# EAGLE board C10 (EAGLE 7.5.0)
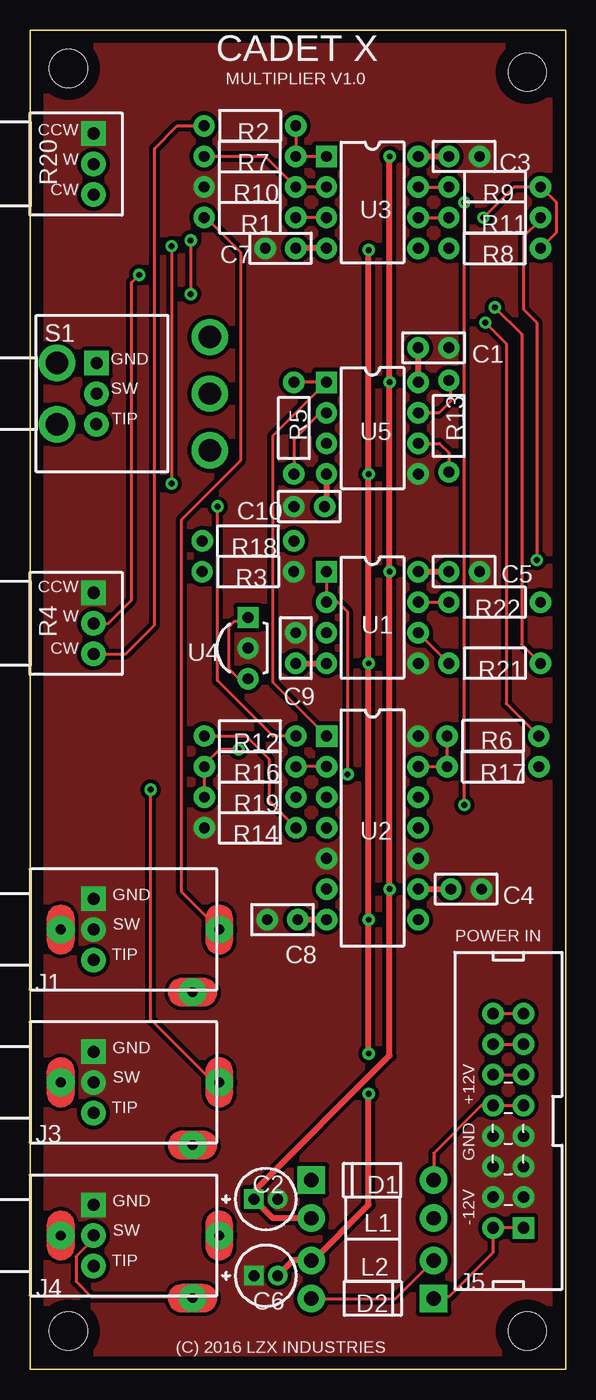
[diagram p0: board, top side]
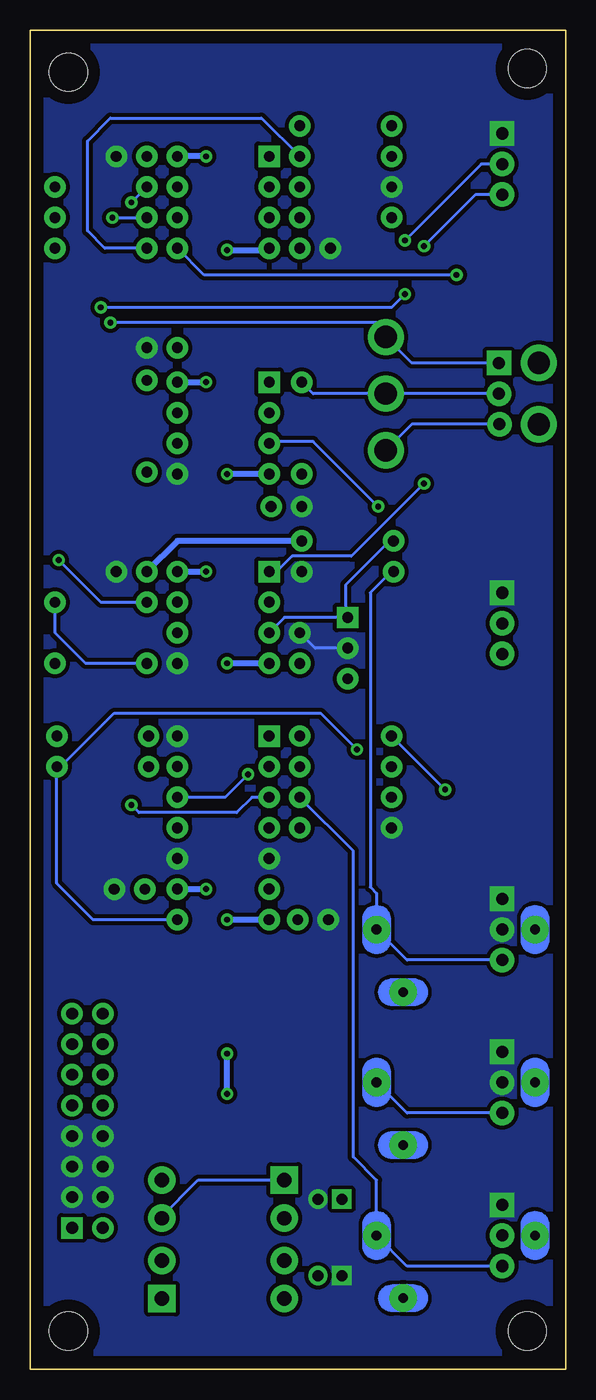
[diagram p1: board, bottom side, seen from below]

Size 44.45 x 111.12 mm. Coordinates in mm from the lower left corner, seen from the top.
Outline: 0,0 44.45,0 44.45,111.12 0,111.12 0,0
Copper layers (1*16): Top 0.035mm / dielectric 1.5mm / Bottom 0.035mm
Design rules "default *": minimum track width 10mil, minimum drill 0.61mm, track to track 8mil, track to pad 8mil, pad to pad 8mil, via to via 8mil, smd to smd 8mil, copper to edge 40mil, drill to drill 8mil, minimum pad ring 0mil, minimum via ring 8mil, stop-mask expansion 2mil, vias tented up to drill 19mil, thermal gap 10mil
Net classes: 0 Default: width 0.254 mm, clearance 0.203 mm, clearance 0.203 mm to class 1; 1 Power Rails: width 0.508 mm, clearance 0.203 mm, clearance 0.203 mm to class 0
Holes 3.17 mm at 3.17,3.17 3.17,107.95 41.27,3.17 41.27,107.63

## Footprints (pad centres in the part's own frame; a part is rotated, then mirrored left to right if it is on the bottom)
CAP-2.54/6.6x3 = drill 0.889 pad 1.778: 1 -1.27,0; 2 1.27,0
CAPPR-2/5.08 = drill 0.9 pad 1.6 square: 1 -0.991,0 | drill 0.9 pad 1.6: 2 0.991,0
CAPPR-2/5.08_C6 = drill 0.9 pad 1.6 square: 1 -0.991,0 | drill 0.9 pad 1.6: 2 0.991,0
CAP-2.54/6.6x3_C7 = drill 0.889 pad 1.778: 1 -1.27,0; 2 1.27,0
CAP-2.54/6.6x3_C8 = drill 0.889 pad 1.778: 1 -1.27,0; 2 1.27,0
CAP-2.54/6.6x3_C9 = drill 0.889 pad 1.778: 1 -1.27,0; 2 1.27,0
CAP-2.54/6.6x3_C10 = drill 0.889 pad 1.778: 1 -1.27,0; 2 1.27,0
DO-41 = drill 1.2 pad 2.286 square: 1 -5.08,0 | drill 1.2 pad 2.286: 2 5.08,0
DO-41_D2 = drill 1.2 pad 2.286 square: 1 -5.08,0 | drill 1.2 pad 2.286: 2 5.08,0
PJ302M = drill 0.8 pad 2.286: 1A 2.54,0; 2A 13.487,-5.207; 3A 15.697,0 | drill 1 pad 2.032 square: 1B 5.258,2.54 | drill 1 pad 2.032: 2B 5.258,0; 3B 5.258,-2.54
PJ302M_J4 = drill 0.8 pad 2.286: 1A 2.54,0; 2A 13.487,-5.207; 3A 15.697,0 | drill 1 pad 2.032 square: 1B 5.258,2.54 | drill 1 pad 2.032: 2B 5.258,0; 3B 5.258,-2.54
IDC16M = drill 0.965 pad 1.778 square: 1 8.89,1.27 | drill 0.965 pad 1.778: 2 8.89,-1.27; 3 6.35,1.27; 4 6.35,-1.27; 5 3.81,1.27; 6 3.81,-1.27; 7 1.27,1.27; 8 1.27,-1.27; 9 -1.27,1.27; 10 -1.27,-1.27; 11 -3.81,1.27; 12 -3.81,-1.27; 13 -6.35,1.27; 14 -6.35,-1.27; 15 -8.89,1.27; 16 -8.89,-1.27
FB-10.16/4.45x3.5 = drill 1.194 pad 2.286: 1 -5.08,0; 2 5.08,0
RES-7.62/5.1x2.5 = drill 0.889 pad 1.778: 1 -3.81,0; 2 3.81,0
RES-7.62/5.1x2.5_R2 = drill 0.889 pad 1.778: 1 -3.81,0; 2 3.81,0
ALPHA9H = drill 1 pad 2.032 square: 1 5.258,2.54 | drill 1 pad 2.032: 2 5.258,0; 3 5.258,-2.54
10TF230-DIY = drill 1.85 pad 3: 1 -4.7,14.4; 2 0,14.4; 3 4.7,14.4; A -2.55,1.7; B 2.55,1.7 | drill 1 pad 2.032 square: 1B -2.54,5 | drill 1 pad 2.032: 2B 0,5; 3B 2.54,4.964
DIP-8 = drill 0.9 pad 1.778 square: 1 -3.81,3.81 | drill 0.9 pad 1.778: 2 -3.81,1.27; 3 -3.81,-1.27; 4 -3.81,-3.81; 5 3.81,-3.81; 6 3.81,-1.27; 7 3.81,1.27; 8 3.81,3.81
DIP-14 = drill 0.9 pad 1.778 square: 1 -3.81,7.62 | drill 0.9 pad 1.778: 2 -3.81,5.08; 3 -3.81,2.54; 4 -3.81,0; 5 -3.81,-2.54; 6 -3.81,-5.08; 7 -3.81,-7.62; 8 3.81,-7.62; 9 3.81,-5.08; 10 3.81,-2.54; 11 3.81,0; 12 3.81,2.54; 13 3.81,5.08; 14 3.81,7.62
TO-92-100R = drill 0.889 pad 1.778 square: 1 2.54,0 | drill 0.889 pad 1.778: 2 0,0; 3 -2.54,0

## Placement (x,y rotation side)
C1  100n  [CAP-2.54/6.6x3]  33.49,84.77 0 top
C2  10u 25V  [CAPPR-2/5.08]  19.57,14.12 0 top
C3  100n  [CAP-2.54/6.6x3]  36.03,100.65 0 top
C4  100n  [CAP-2.54/6.6x3]  36.2,39.85 0 top
C5  100n  [CAP-2.54/6.6x3]  36.03,66.2 0 top
C6  10u 25V  [CAPPR-2/5.08_C6]  19.57,7.77 0 top
C7  100n  [CAP-2.54/6.6x3_C7]  20.79,93.03 0 top
C8  100n  [CAP-2.54/6.6x3_C8]  20.96,37.31 0 top
C9  100n  [CAP-2.54/6.6x3_C9]  22.06,59.85 270 top
C10  100n  [CAP-2.54/6.6x3_C10]  23.17,71.59 0 top
D1  1N4001  [DO-41]  28.42,15.71 0 top
D2  1N4001  [DO-41_D2]  28.42,5.87 180 top
J1  PJ302M  [PJ302M]  0,36.5 0 top
J3  PJ302M  [PJ302M]  0,23.81 0 top
J4  PJ302M  [PJ302M_J4]  0,11.11 0 top
J5  EUROPWR16  [IDC16M]  39.69,20.63 270 top
L1  68R  [FB-10.16/4.45x3.5]  28.42,12.54 180 top
L2  68R  [FB-10.16/4.45x3.5]  28.42,9.05 180 top
R1  499R  [RES-7.62/5.1x2.5]  18.25,95.57 0 top
R2  4.99K  [RES-7.62/5.1x2.5_R2]  18.25,103.19 180 top
R3  100K  [RES-7.62/5.1x2.5_R2]  18.08,66.19 180 top
R4  B10K  [ALPHA9H]  0,61.9 0 top
R5  1K  [RES-7.62/5.1x2.5]  21.9,78.1 90 top
R6  1.5K  [RES-7.62/5.1x2.5_R2]  38.42,52.55 180 top
R7  1K  [RES-7.62/5.1x2.5]  18.25,100.65 0 top
R8  10K  [RES-7.62/5.1x2.5]  38.57,93.03 0 top
R9  10K  [RES-7.62/5.1x2.5_R2]  38.57,98.11 180 top
R10  665R  [RES-7.62/5.1x2.5]  18.25,98.11 0 top
R11  10K  [RES-7.62/5.1x2.5_R2]  38.57,95.57 180 top
R12  499R  [RES-7.62/5.1x2.5]  18.26,52.55 0 top
R13  1K  [RES-7.62/5.1x2.5]  34.76,78.26 90 top
R14  100K  [RES-7.62/5.1x2.5]  18.26,44.93 0 top
R16  1.5K  [RES-7.62/5.1x2.5]  18.26,50.01 0 top
R17  1.5K  [RES-7.62/5.1x2.5]  38.42,50.01 0 top
R18  4.99K  [RES-7.62/5.1x2.5]  18.09,68.74 0 top
R19  499R  [RES-7.62/5.1x2.5]  18.26,47.47 0 top
R20  B10K  [ALPHA9H]  0,100.01 0 top
R21  10K  [RES-7.62/5.1x2.5_R2]  38.57,58.58 180 top
R22  10K  [RES-7.62/5.1x2.5_R2]  38.57,63.66 180 top
S1  10TF230-DIY  [10TF230-DIY]  0.52,80.96 270 top
U1  TL072  [DIP-8]  28.41,62.39 0 top
U2  LT1251  [DIP-14]  28.42,44.93 0 top
U3  LM6172  [DIP-8]  28.41,96.84 0 top
U4  TL431  [TO-92-100R]  18.09,59.85 90 top
U5  LM6172  [DIP-8]  28.41,78.1 0 top

## Library data of the parts
C1-C10 D1 D2 J5 R1-R3 R5-R14 R16-R19 R21 R22 S1 = common
J1 J3 J4 = common; DATASHEET: http://www.thonk.co.uk/shop/pj302m/
L1 L2 = common; MANUFACTURER: Fair-Rite
R4 R20 = common; DATASHEET: http://www.thonk.co.uk/shop/alpha-9mm-pots/; MANUFACTURER: Alpha
U1 = common; DATASHEET: http://datasheets.diptrace.com\ti\TL07x.pdf; MANUFACTURER: Texas Instruments
U2 = common; DATASHEET: http://datasheets.diptrace.com\linear\LT1251_1256.pdf; MANUFACTURER: Linear
U3 U5 = common; DATASHEET: http://www.ti.com/lit/gpn/lm6172; MANUFACTURER: Texas Instruments
U4 = common; DATASHEET: http://datasheets.diptrace.com\st_micro\CD00000986.pdf; MANUFACTURER: ST Microelectronics

## Nets
0V: C1.2 C2.2 C3.2 C4.2 C5.2 C6.1 C7.1 C8.1 C9.1 C10.1 J1.1A J1.1B J1.2A J1.2B J3.1A J3.1B J3.2A J3.2B J4.1A J4.1B J5.3 J5.4 J5.5 J5.6 J5.7 J5.8 R3.1 R4.1 R10.1 R14.1 R20.1 U1.5 U2.5 U2.10 U2.14 U4.2 U5.5
+2.5V_Reference: R20.3 U1.1 U1.2 U2.12
+12V [Power Rails]: C1.1 C2.1 C3.1 C4.1 C5.1 L1.2 R18.2 U1.8 U2.9 U3.8 U5.8
-12V [Power Rails]: C6.2 C7.2 C8.2 C9.2 C10.2 L2.2 U1.4 U2.7 U3.4 U5.4
BIAS_CTRL_BUFFERED: R11.1 R22.2 U1.7
BUFFERED_VC_TO_FADER: R9.2 U2.3 U3.7
Net_0: R6.1 S1.1 S1.1B
Net_1: D2.2 L2.1
Net_2: D1.1 L1.1
Net_3: J5.13 J5.14
Net_4: J5.15 J5.16
Net_5: D2.1 J5.1 J5.2
Net_10: R1.2 U3.3
Net_13: R12.2 U5.3
Net_17: R2.2 R4.3
Net_23: R4.2 U3.5
Net_26: R5.1 U5.2
Net_27: R5.2 S1.2 S1.2B U2.1 U5.1
Net_28: R20.2 R21.1
Net_29: R13.1 U5.6
Net_30: R13.2 U5.7
Net_31: J4.2A J4.2B
Net_32: J5.11 J5.12
Net_33: D1.2 J5.9 J5.10
Net_34: J4.3A J4.3B R19.2
Net_35: S1.3 S1.3B
Net_45: R16.1 R17.2 R19.1 U2.8
Net_46: R6.2 R17.1 U2.13
Net_49: R16.2 U2.2
Net_50: R18.1 U1.3 U4.1 U4.3
Net_52: R7.1 R10.2 U3.2
Net_53: R2.1 R7.2 R8.1 U3.1
Net_54: R8.2 R9.1 R11.2 U3.6
Net_58: J1.3A J1.3B R1.1 R3.2
Net_60: R21.2 R22.1 U1.6
Net_64: J3.3A J3.3B R12.1 R14.2

## Tracks (layer width: path | path; a pad name or v marks a point on that pad's centre or on a via)
0V
  Bottom 0.254: U4.2 20.79,59.85 C9.1
  pour Top (isolate 0.33, no thermals): 0.95,110.17 43.34,110.18 43.34,0.95 0.95,0.95 0.95,9.21
  pour Bottom (isolate 0.33, no thermals): 0.95,110.17 43.34,110.18 43.34,0.95 0.95,0.95 0.95,9.21
+2.5V_Reference  (via drill 0.49 pad 1.02)
  Top 0.254: U1.1 U1.2 25.57,63.66 26.36,62.87 v26.36,49.38 | v11.75,93.2 v11.75,73.51
  Bottom 0.254: R20.3 7.47,97.47 v11.75,93.2 | v11.75,73.51 17.78,67.48 22.7,67.48 23.98,66.2 U1.1 | v26.36,49.38 28.26,47.47 U2.12
+12V  (via drill 0.49 pad 1.02)
  Top 0.508: L1.2 20.16,12.54 C2.1 18.58,14.77 29.85,26.04 v29.85,39.85 v29.85,66.2 v29.85,81.91 v29.85,100.65 | U1.8 C5.1 | U3.8 C3.1 | U5.8 C1.1 | U2.9 C4.1
  Bottom 0.508: v29.85,100.65 U3.8 | U5.8 v29.85,81.91 | U1.8 v29.85,66.2 | U2.9 v29.85,39.85 | R18.2 32.22,68.74 C5.1
-12V  (via drill 0.49 pad 1.02)
  Top 0.508: C6.2 21.83,9.04 L2.2 23.34,8.89 28.1,13.65 v28.1,22.86 | v28.1,26.2 v28.1,37.31 v28.1,58.59 v28.1,74.29 v28.1,92.88 | v28.1,22.86 | v28.1,26.2 | C9.2 U1.4 | U2.7 C8.2 | U3.4 C7.2 | U5.4 24.6,71.75 C10.2 | v28.1,22.86
  Bottom 0.508: v28.1,22.86 v28.1,26.2 | v28.1,92.88 24.75,92.88 U3.4 | U5.4 v28.1,74.29 | U2.7 v28.1,37.31 | U1.4 v28.1,58.59
BIAS_CTRL_BUFFERED  (via drill 0.49 pad 1.02)
  Top 0.254: U1.7 R22.2 | R22.2 | R11.1 42.38,95.41 40.96,93.99 40.96,87.96 42.07,86.84 v42.07,67.16
  Bottom 0.254: v42.07,67.16 38.58,63.66 34.77,63.66 R22.2
BUFFERED_VC_TO_FADER  (via drill 0.49 pad 1.02)
  Top 0.254: U3.7 R9.2 | R9.2 | v36.04,46.84 v36.04,96.83
  Bottom 0.254: U2.3 26.04,47.47 27.31,46.2 35.41,46.2 v36.04,46.84 | v36.04,96.83 R9.2
Net_0  (via drill 0.49 pad 1.02)
  Top 0.254: v37.79,86.84 39.53,85.1 39.53,55.25 R6.1
  Bottom 0.254: S1.1B 12.76,83.5 S1.1 14.92,86.84 v37.79,86.84
Net_1
  Top 0.254: D2.2 30.32,5.87 L2.1
Net_2
  Bottom 0.254: L1.1 33.66,12.54 30.49,15.71 D1.1
Net_3
  Top 0.254: J5.14 J5.13
Net_4
  Top 0.254: J5.16 J5.15
Net_5
  Top 0.254: J5.1 J5.2 38.42,9.69 34.77,6.03 33.66,6.03 D2.1
Net_10
  Top 0.254: U3.3 R1.2
Net_13  (via drill 0.49 pad 1.02)
  Top 0.254: R12.2 20.16,52.55 15.56,57.16 v15.56,71.6
  Bottom 0.254: v15.56,71.6 20.96,77 24.43,77 U5.3
Net_17
  Top 0.254: R4.3 7.92,59.36 10.32,61.76 10.32,101.29 12.22,103.19 R2.2
Net_23  (via drill 0.49 pad 1.02)
  Top 0.254: R4.2 6.49,61.9 8.41,63.82 8.41,90.18 v9.05,90.81
  Bottom 0.254: v9.05,90.81 30.01,90.81 U3.5
Net_26
  Top 0.254: U5.2 24.12,79.37 21.9,77.15 R5.1
Net_27
  Top 0.254: R5.2 U5.1 20.16,77.48 20.16,57 U2.1
  Bottom 0.254: S1.2B S1.2 | S1.2 | S1.2 20.95,80.96 R5.2
Net_28  (via drill 0.49 pad 1.02)
  Top 0.254: v13.34,93.67 v13.34,89.23 | v38.58,88.11 40.8,85.89 40.8,60.16 R21.1
  Bottom 0.254: R20.2 7,100.01 v13.34,93.67 | v13.34,89.23 14.45,88.11 v38.58,88.11
Net_29
  Top 0.254: U5.6 33.98,76.83 34.76,76.06 R13.1
Net_30
  Top 0.254: U5.7 33.97,79.37 34.93,80.34 34.93,81.91 R13.2
Net_31
  Top 0.254: J4.2B 5.26,10.81 3.81,9.37 3.81,7.3 5.08,6.03 13.36,6.03 J4.2A
Net_32
  Top 0.254: J5.12 J5.11
Net_33
  Top 0.254: J5.9 J5.10 37.46,21.9 33.5,17.94 D1.2
Net_34
  Bottom 0.254: J4.3B 13.16,8.57 J4.3A 15.7,15.7 17.62,17.62 17.62,43.02 R19.2
Net_35
  Bottom 0.254: S1.3B 12.76,78.42 S1.3
Net_45  (via drill 0.49 pad 1.02)
  Top 0.254: R19.1 R16.1 14.45,50.17 15.72,51.44 v17.31,51.44
  Bottom 0.254: U2.8 39.22,37.31 42.23,40.33 R17.2 41.91,50.01 37.47,54.46 20.32,54.46 v17.31,51.44
Net_46
  Top 0.254: R6.2 R17.1 U2.13
Net_49
  Top 0.254: U2.2 R16.2
Net_50
  Top 0.254: U4.3 17.31,57.31 16.51,58.11 16.51,61.6 16.99,62.08 17.78,62.08 U4.1
  Bottom 0.254: R18.1 14.62,68.74 18.26,65.09 18.26,62.22 U4.1 23.33,62.39 U1.3
Net_52
  Top 0.254: U3.2 R10.2 | R10.2 | R7.1 19.52,100.65 R10.2
Net_53
  Top 0.254: R2.1 R7.2 U3.1
  Bottom 0.254: R8.1 38.25,93.03 39.69,94.47 39.69,101.93 37.79,103.83 25.25,103.83 R7.2
Net_54  (via drill 0.49 pad 1.02)
  Top 0.254: U3.6 R11.2 | v37.62,95.57 40.16,98.11 R9.1 43.66,96.83 43.66,94.31 R8.2
  Bottom 0.254: v37.62,95.57 R11.2
Net_58
  Top 0.254: R1.1 14.62,95.57 17.46,92.72 17.46,75.41 12.54,70.49 12.54,39.65 J1.3A
  Bottom 0.254: J1.3B 13.16,33.96 J1.3A 15.7,39.51 16.2,40.01 16.2,64.45 14.46,66.19 R3.2
Net_60
  Top 0.254: U1.6 R21.2
  Bottom 0.254: R21.2 39.84,58.58 42.38,61.12 R22.1
Net_64  (via drill 0.49 pad 1.02)
  Top 0.254: R12.1 17.94,52.55 19.85,50.65 19.85,47.16 R14.2 | J3.3A 15.24,23.81 10,29.05 v10,48.1
  Bottom 0.254: J3.3B 13.16,21.27 J3.3A | v10,48.1 R12.1

## Text on the board
tPlace: CADET X | MULTIPLIER V1.0 | CCW | R2 | W | R7 | C3 | CW | R20 | R10 | R9 | U3 | R1 | R11 | C7 | R8 | S1 | GND | C1 | SW | TIP | R5 | U5 | R13 | C10 | R18 | CCW | R3 | C5 | W | R22 | R4 | U1 | CW | U4 | R21 | C9 | R12 | R6 | R16 | R17 | R19 | R14 | U2 | GND | C4 | SW | POWER IN | TIP | C8 | J1 | GND | SW | TIP | +12V | J3 | GND | C2 | D1 | GND | SW | -12V | L1 | TIP | L2 | J5 | J4 | C6 | D2 | (C) 2016 LZX INDUSTRIES
tDocu: R2 | R7 | C3 | R20 | R10 | R9 | U3 | R1 | R11 | C7 | R8 | S1 | C1 | R5 | U5 | R13 | C10 | R18 | R3 | C5 | R22 | R4 | U1 | U4 | R21 | C9 | R12 | R6 | R16 | R17 | R19 | R14 | U2 | C4 | C8 | J1 | J3 | C2 | D1 | L1 | L2 | J5 | J4 | C6 | D2